# Altium PCB PCB1.PcbDoc
Units mil, origin at the board's own origin, x right, y up, seen from the top; angles counter-clockwise.
Board outline 3045 x 2565 mil, 2 copper layers (Top Layer, Bottom Layer); 21 components, 20 nets, 80 pads, 0 vias.
Unrouted connection lines stored in the file: 2.
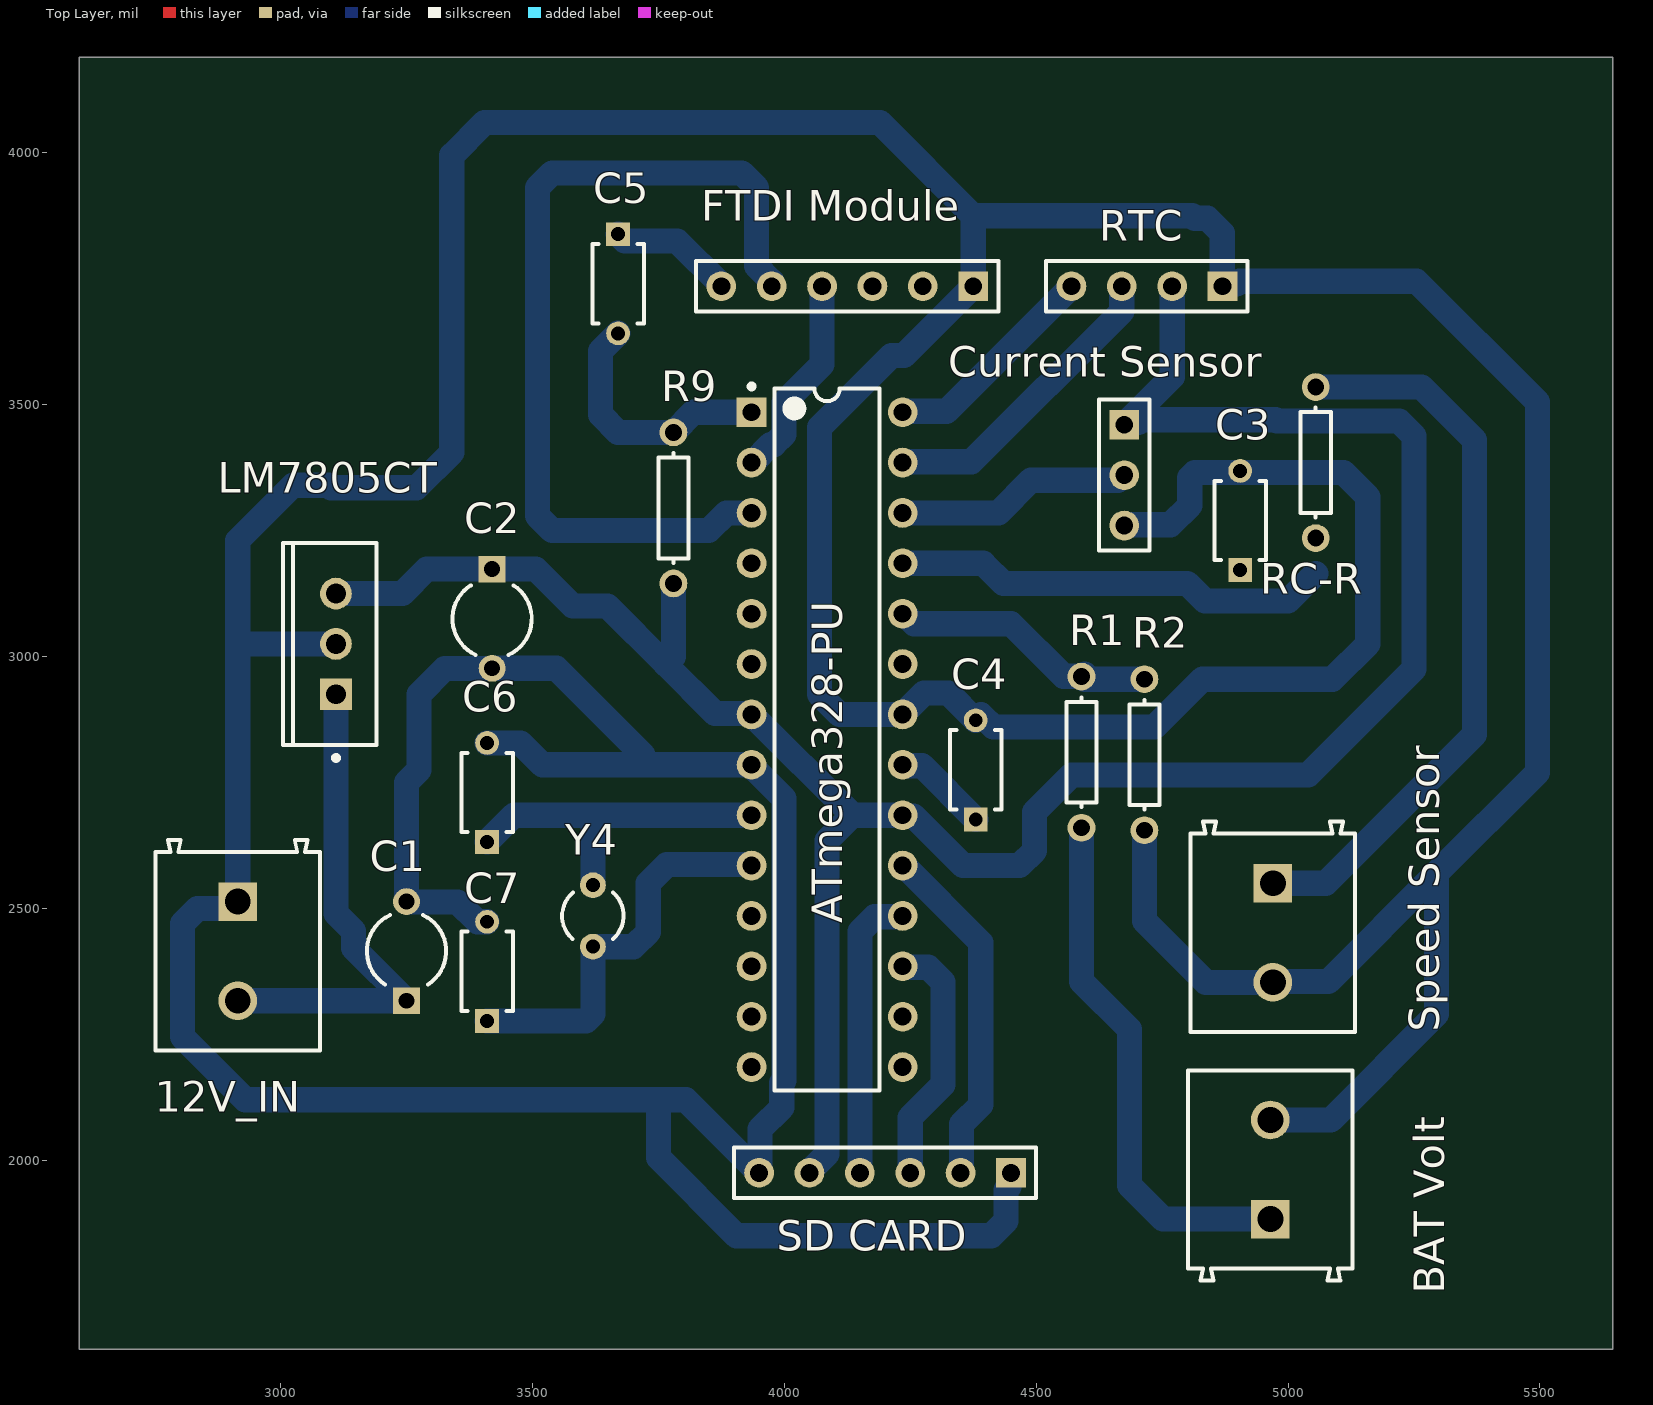
[diagram p0: Top Layer view]
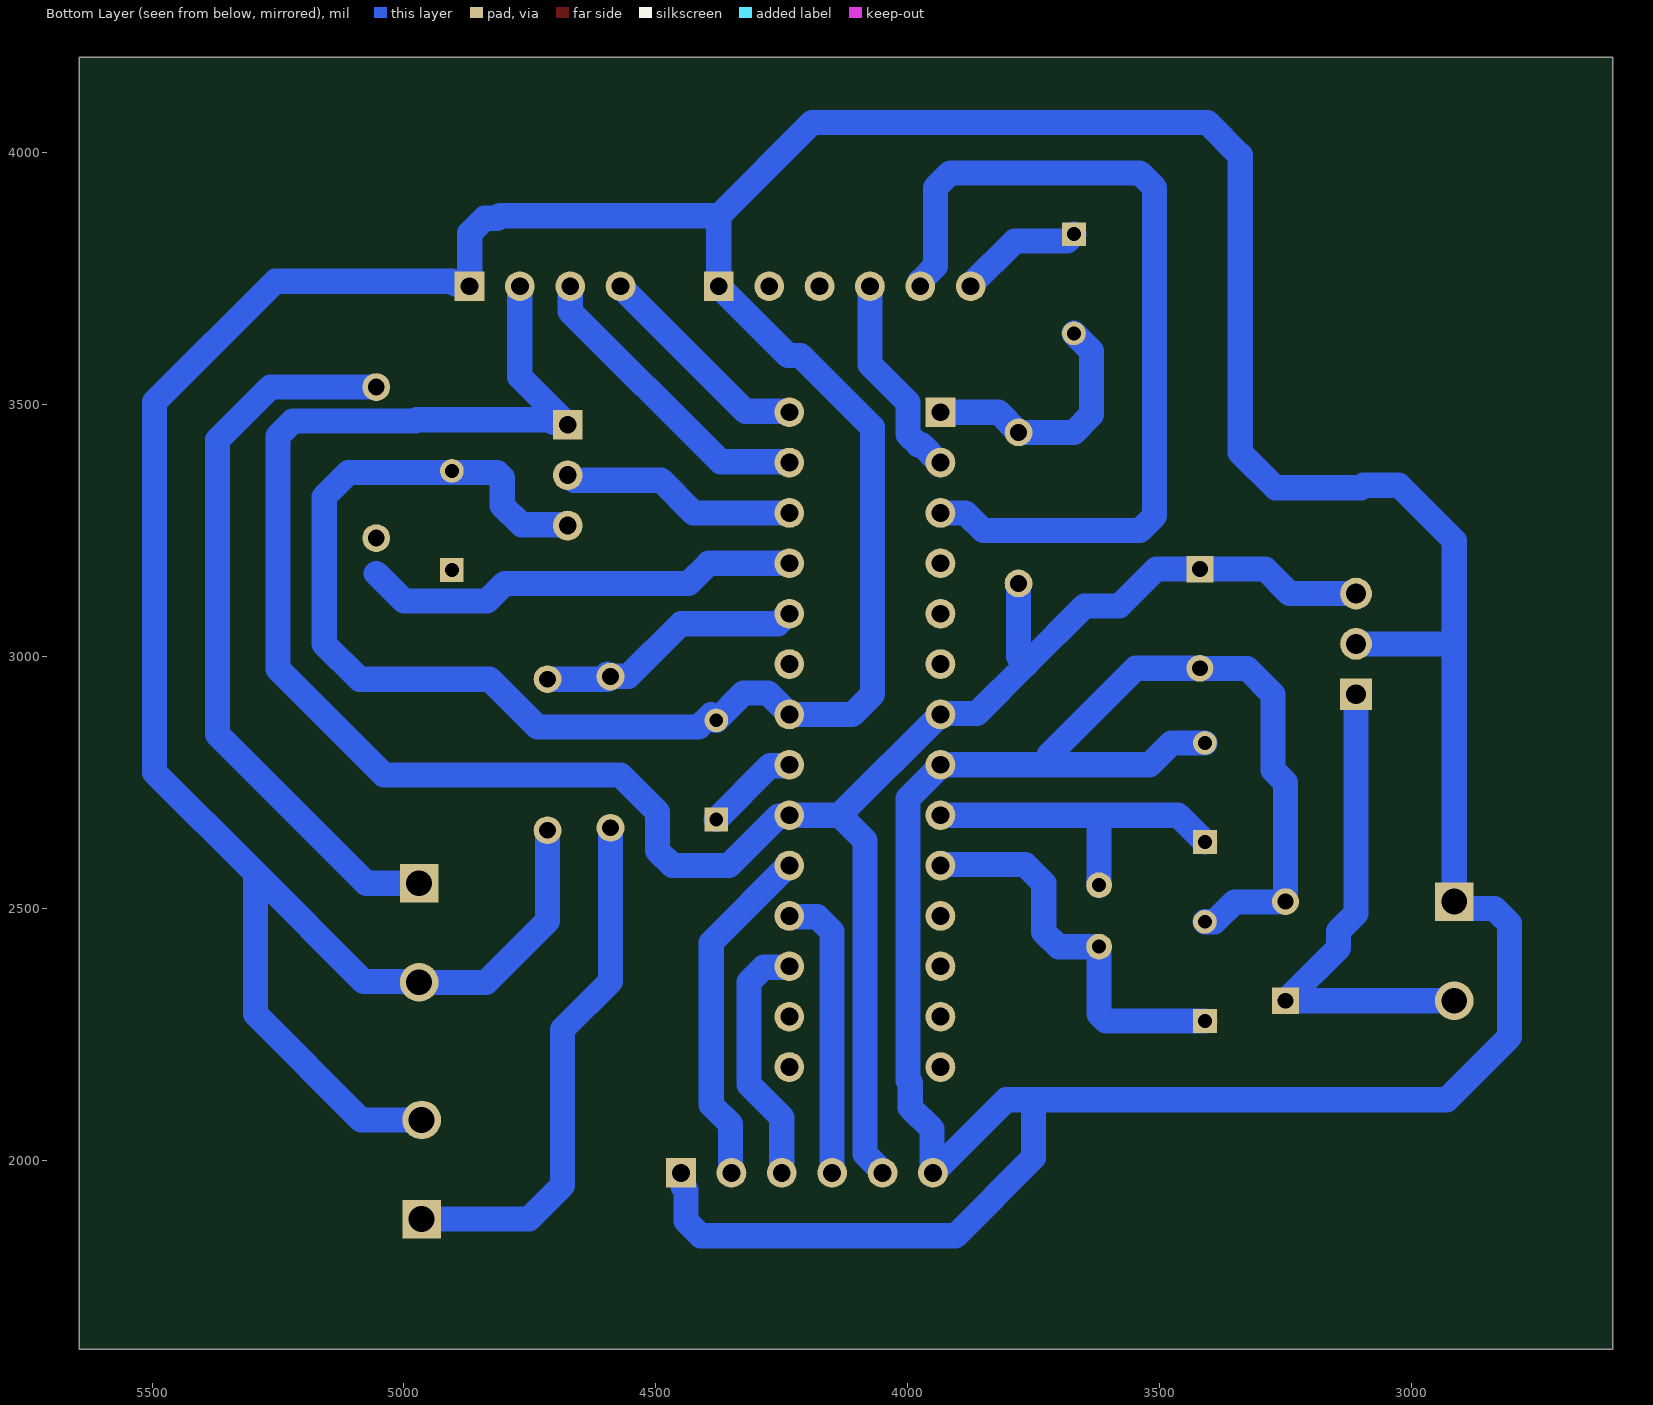
[diagram p1: Bottom Layer view, seen from below]

## Layer stack, top to bottom
Top Solder: solder mask 0.4, Solder Resist, Dk 3.5
Top Layer: signal copper 1.4
Dielectric 1: dielectric 12.6, FR-4, Dk 4.8
Bottom Layer: signal copper 1.4
Bottom Solder: solder mask 0.4, Solder Resist, Dk 3.5

## Board outline
2600,1625 5645,1625 5645,4190 2600,4190

## Design rules (kind name [scope] priority, off if disabled: settings)
Clearance [All] p1: gap=10 ignorepadtopadclearanceinfootprint=FALSE except(0: Arc-Hole Track-Hole SMDPad-Hole THPad-Hole Via-Hole Fill-Hole Poly-Hole Region-Hole Text-Hole)
PolygonConnect [All] p1: connectstyle=Relief reliefconductorwidth=10 reliefentries=4 polygonreliefangle="90 Angle" airgapwidth=10
RoutingVias [All] p1: holewidth=28 width=50 viastyle="Through Hole" minholewidth=28 minwidth=50 maxholewidth=28 maxwidth=50
SolderMaskExpansion [All] p1: expansion=4 istentingtop=FALSE
Width [All] p1: maxlimit=50 minlimit=50 preferedwidth=50 minimp=50.000000 maximp=50.000000 favimp=50.000000
30 further rules are at their usual default settings.

## Components (designator, comment, footprint, x,y, rotation, side; value= is the part's Value field where it differs from the comment)
12V_IN "691213710002" 691213710002 2915,2415 r270 top
ATmega328-PU "ATmega328-PU" 28P3 4085,2835 r0 top
"BAT Volt" "691213710002" 691213710002 4965,1981.58 r90 top
C1 "Cap2" CAPR5-4X5 3250,2415 r90 top value=100uF
C2 "Cap2" CAPR5-4X5 3420,3075 r270 top value=100uF
C3 "100nF" FP-K15H5-MFG 4905,3270 r90 top
C4 "K104K15X7RF53H5" FP-K15H5-MFG 4380,2775 r90 top
C5 "K104K15X7RF53H5" FP-K15H5-MFG 3670,3740 r270 top
C6 "22pF" FP-K15H5-MFG 3410,2730 r90 top
C7 "22pF" FP-K15H5-MFG 3410,2375 r90 top
"Current Sensor" "Current Sensor" HDR1X3 4675,3460 r270 top
"FTDI Module" "FTDI Module" HDR1X6 4375,3735 r180 top
LM7805CT "LM7805CT" FAIR-TO-220-3 3110,3025 r180 top
R1 "Res1" AXIAL-0.3 4590,2810 r90 top value=1K
R2 "Res1" AXIAL-0.3 4715,2805 r270 top value=1K
R9 "Res1" AXIAL-0.3 3780,3295 r90 top value=10K
RC-R "Res1" AXIAL-0.3 5055,3385 r270 top value=1K
RTC "Header 4" HDR1X4 4870,3735 r180 top
"SD CARD" "SD CARD" HDR1X6 4450,1975 r180 top
"Speed Sensor" "Speed Sensor" 691213710002 4970,2451.57 r270 top
Y4 "XTAL" R38 3620,2485 r180 top

## Footprints (in the part's own frame and the unit in brackets; to place one, negate y for a bottom-side part, rotate by r counter-clockwise, add the part's x,y. Pads: shape width x height; smd on the part's side, far side on the other; paste and mask are expansions set on the pad)
28P3 [mm] "28-Pin Plastic Dual In-Line Package (PDIP)"
  rect 1.5x1.5 hole 0.9: 1(-3.81,16.51)
  round 1.5 hole 0.9: 2(-3.81,13.97) 3(-3.81,11.43) 4(-3.81,8.89) 5(-3.81,6.35) 6(-3.81,3.81) 7(-3.81,1.27) 8(-3.81,-1.27) 9(-3.81,-3.81) 10(-3.81,-6.35) 11(-3.81,-8.89) 12(-3.81,-11.43) 13(-3.81,-13.97) 14(-3.81,-16.51) 15(3.81,-16.51) 16(3.81,-13.97) 17(3.81,-11.43) 18(3.81,-8.89) 19(3.81,-6.35) 20(3.81,-3.81) 21(3.81,-1.27) 22(3.81,1.27) 23(3.81,3.81) 24(3.81,6.35) 25(3.81,8.89) 26(3.81,11.43) 27(3.81,13.97) 28(3.81,16.51)
  silkscreen extent -3.93,-17.7 2.65,17.93, body extent -3.6,-17.65 3.6,17.65, height 4.58
691213710002 [mm] "5,00mm - modular - green - Horizontal entry with rising cage clamp -  10,0mm height - 02p"
  rect 1.95x1.95 hole 1.3: 1(-2.5,0)
  round 1.95 hole 1.3: 2(2.5,0)
  silkscreen extent -5.6,-4.15 5,4.15, body extent -5.6,-4.15 5,4.15, height 10.05
AXIAL-0.3 [mm] "Axial Device, Thru-Hole; 2 Leads; 0.3 in Pin Spacing"
  round 1.4 hole 0.85: 1(-3.81,0) 2(3.81,0)
  silkscreen extent -2.77,-0.76 2.77,0.76
CAPR5-4X5 [mm] "Capacitor; 2 Leads"
  rect 1.35x1.35 hole 0.8: 1(-2.5,0)
  round 1.35 hole 0.8: 2(2.5,0)
  silkscreen extent -1.69,-2 1.82,2
FAIR-TO-220-3 [mm] "FM, 3-Leads, Body 10.2x4.7mm, Pitch 2.54mm"
  rect 1.6x1.6 hole 1: 1(0,2.54)
  round 1.6 hole 1: 2(0,0) 3(0,-2.54)
  silkscreen extent -2.04,-5.1 2.66,5.87, body extent -2.04,-5.1 2.66,5.1, height 18.95
FP-K15H5-MFG [mm]
  rect 1.2x1.2 hole 0.7 paste-1000 mask+0: 1(-2.5,0)
  round 1.2 hole 0.7 paste-1000 mask+0: 2(2.5,0)
  silkscreen extent -2,-1.3 2,1.3, body extent -3.2,-1.4 3.2,1.4, height 0.25
HDR1X3 [mm] "Connector; Header; 3 Position"
  rect 1.5x1.5 hole 0.9: 1(0,0)
  round 1.5 hole 0.9: 2(2.54,0) 3(5.08,0)
  silkscreen extent -1.27,-1.27 6.35,1.27
HDR1X4 [mm] "Connector; Header; 4 Position"
  rect 1.5x1.5 hole 0.9: 1(0,0)
  round 1.5 hole 0.9: 2(2.54,0) 3(5.08,0) 4(7.62,0)
  silkscreen extent -1.27,-1.27 8.89,1.27
HDR1X6 [mm] "Connector; Header; 6 Position"
  rect 1.5x1.5 hole 0.9: 1(0,0)
  round 1.5 hole 0.9: 2(2.54,0) 3(5.08,0) 4(7.62,0) 5(10.16,0) 6(12.7,0)
  silkscreen extent -1.27,-1.27 13.97,1.27
R38 [mm] "Crystal, Thru-Hole; 2 Leads; Body 3.1 x 8.2 mm (Dia.xH)"
  round 1.3 hole 0.7: 1(0,1.55) 2(0,-1.55)
  silkscreen extent -1.55,-1.19 1.55,1.17

## Part data
12V_IN "BAT Volt": library part CMP-1502-02526-1, "Serie 213 - 5.00 mm Horizontal Entry Modular with RisingCage Clamp WR-TBL, 2 pin", Manufacturer="Wurth Elektronik", Operating Temperature=-40to105degC, Datasheet URL=http://katalog.we-online.de/em/datasheet/6912137100xx.pdf, Manufacturer URL=http://www.we-online.de, Mounting Technology=THT, Package Reference=691213710002, Packaging=Box, Part Number=691213710002, Pin Number=2, Pitch=5.00mm, Publisher=WurthElektronik
ATmega328-PU: "8-bit AVR Microcontroller, 32KB Flash, 1KB EEPROM, 2KB SRAM, 28-pin PDIP, Industrial Grade (-40°C to 85°C)", ComponentLink1Description="Manufacturer URL", ComponentLink1URL=http://www.atmel.com/, ComponentLink2Description="ATmega48A/48PA/88A/88PA/168A/168PA/328/328P Datasheet", ComponentLink2URL=http://www.atmel.com/dyn/resources/prod_documents/8271.pdf, ComponentLink3Description="ATmega48A/48PA/88A/88PA/168A/168PA/328/328P Summary", ComponentLink3URL=http://www.atmel.com/dyn/resources/prod_documents/8271S.pdf, DatasheetVersion="revD, May-2011", PackageDescription="28-lead (0.300\"/7.62mm Wide) Plastic Dual Inline Package (PDIP)", PackageReference=28P3, PackageVersion="revB, Sep-2001"
C1 C2: "Capacitor", PackageDescription="Capacitor; 2 Leads", PackageReference=CAPR5-4X5, Published=23-Sep-2002, Publisher="Altium Limited"
C3: library part CMP-02417-000048-1, "CAP CER 0.1UF 50V X7R RADIAL", Case/Package=Dipped, Dielectric=X7R, Max Operating Temperature=125°C, Min Operating Temperature=-55°C, Package Quantity=5000, Tolerance=10%, Voltage=50V, Capacitance=100nF, Construction=RADIAL, Depth=2.5mm, Diameter=500um, Height=4mm, Height - Seated (Max)=0.1inch, Lead Diameter=0.5mm, Lead Length=30mm, Lead Pitch=5mm, Lead/Base Style="Formed Leads", Length=4mm, Mount="Through Hole", Packaging=Bulk, Radiation Hardening=No, RoHS Compliant=Yes, Series=K, Termination=Radial, Thickness=2.6mm, Voltage Rating=50V, Voltage Rating (DC)=50V, Weight=0.005644oz, Width=2.5mm
C4 C5 C6 C7: library part CMP-02417-000048-1, "CAP CER 0.1UF 50V X7R RADIAL", Capacitance=100nF, Case/Package=Dipped, Dielectric=X7R, Max Operating Temperature=125°C, Min Operating Temperature=-55°C, Package Quantity=5000, Tolerance=10%, Voltage=50V, Construction=RADIAL, Depth=2.5mm, Diameter=500um, Height=4mm, Height - Seated (Max)=0.1inch, Lead Diameter=0.5mm, Lead Length=30mm, Lead Pitch=5mm, Lead/Base Style="Formed Leads", Length=4mm, Mount="Through Hole", Packaging=Bulk, Radiation Hardening=No, RoHS Compliant=Yes, Series=K, Termination=Radial, Thickness=2.6mm, Voltage Rating=50V, Voltage Rating (DC)=50V, Weight=0.005644oz, Width=2.5mm
"Current Sensor": library part "Header 3", "Header, 3-Pin", LatestRevisionDate=17-Jul-2002, LatestRevisionNote="Re-released for DXP Platform.", Publisher="Altium Limited"
"FTDI Module" "SD CARD": library part "Header 6", "Header, 6-Pin", LatestRevisionDate=17-Jul-2002, LatestRevisionNote="Re-released for DXP Platform.", Publisher="Altium Limited"
LM7805CT: library part CMP-2000-04938-1, "Positive Voltage Regulator, 5 V, 1 A, -40 to 125 degC, 3-Pin TO-220, RoHS, Tube", Manufacturer=FairchildSemiconductor, Maximum Input Voltage=35V, Maximum Output Current=2.2(Typ)A, Maximum Quiescent Current=8mA, Operating Temperature=-40to125degC, Output Voltage=5V, Package=3TO-220AB, Package Description="3-Pin Through Hole Device, Body 10 x 4.5 mm, Pitch 2.54 mm", Package Reference=TO-220, Typical Dropout Voltage @ Current=2@1AV, Accuracy=±4%, Category=LinearRegulator, Datasheet URL=https://datasheet.ciiva.com/26904/lm7805ct-26904988.pdf, Datasheet Version=Aug-12, Line Regulation=100mV, Load Regulation=100mV, Manufacturer URL=https://www.fairchildsemi.com/, Mounting=ThroughHole, Number of Outputs=1, Output Type=Fixed, Package URL=https://www.fairchildsemi.com/package-drawings/TO/TO220B03.pdf, Packaging=Rail/Tube, Polarity=Positive, Rad Hard=No, Type=Linear
R1 R2 R9 RC-R: "Resistor", LatestRevisionDate=17-Jul-2002, LatestRevisionNote="Re-released for DXP Platform.", PackageDescription="Axial Device, Thru-Hole; 2 Leads; 0.3 in Pin Spacing", PackageReference=AXIAL-0.3, Published=8-Jun-2000, Publisher="Altium Limited"
RTC: "Header, 4-Pin", LatestRevisionDate=17-Jul-2002, LatestRevisionNote="Re-released for DXP Platform.", Publisher="Altium Limited"
"Speed Sensor": library part CMP-1502-02526-1, "Serie 213 - 5.00 mm Horizontal Entry Modular with RisingCage Clamp WR-TBL, 2 pin", Manufacturer="Wurth Elektronik", Operating Temperature=-40to105degC, Package Reference=691213710002, Datasheet URL=http://katalog.we-online.de/em/datasheet/6912137100xx.pdf, Manufacturer URL=http://www.we-online.de, Mounting Technology=THT, Packaging=Box, Part Number=691213710002, Pin Number=2, Pitch=5.00mm, Publisher=WurthElektronik
Y4: "Crystal Oscillator", LatestRevisionDate=17-Jul-2002, LatestRevisionNote="Re-released for DXP Platform.", PackageDescription="Crystal, Thru-Hole; 2 Leads; Body 3.1 x 8.2 mm (Dia.xH)", PackageReference=R38, Published=8-Jun-2000, Publisher="Altium Limited"

## Nets (pads, with @x,y where several pads share a name; then routed paths per layer and width w, separated by ;. In a path a pad name is that pad's centre, name@x,y a point inside that pad or via, vN(x,y) a via of type N, cw(c..) or ccw(c..) an arc to the next point about the centre after c; other vN are vias at no path point)
+5: "Current Sensor.1" "SD CARD.5" ATmega328-PU.7 ATmega328-PU.20 C2.1 LM7805CT.3 R9.1 RTC.2 | length 4880.8
  Bottom Layer w50: LM7805CT.3 3241.76,3125 3290.18,3173.43 C2.1 3506.57,3173.43 3580,3100 3649.29,3100 3764.64,2984.64 ; R9.1@3780,3140 3780,3000 3764.64,2984.64 ; 4050,1975 4050,1977.45 4085,2012.45 4085,2635 4135,2685 ; 4675,3460 4691.38,3476.38 4770,3555 RTC.2 ; 4679.53,3464.53 4703.23,3464.53 4708.7,3470 4975,3470 4977.76,3467.24 5220.71,3467.24 5250,3437.95 5250,2975 5040,2765 4570,2765 4496.5,2691.5 4496.5,2614.29 4467.21,2585 4355,2585 4256.73,2683.27 4236.73,2683.27 ATmega328-PU.20 4135,2685 ; 3764.64,2984.64 3862.56,2886.73 3933.27,2886.73 ATmega328-PU.7 4135,2685
BAT_VOLT: ATmega328-PU.24 R1.2 R2.1 | length 533.8
  Bottom Layer w50: ATmega328-PU.24 4237.45,3085 4257.45,3065 4450,3065 4554.02,2960.98 4589.02,2960.98 R1.2 4591.39,2960 R1.2@4596.39,2965 ; R1.2@4596.39,2955 R2.1
Current: "Current Sensor.2" ATmega328-PU.26 | length 471.1
  Bottom Layer w50: ATmega328-PU.26 4425,3285 4490,3350 4662.55,3350 4672.55,3360 4675,3360
GND: 12V_IN.1 "BAT Volt.2" "Current Sensor.3" "FTDI Module.1" "SD CARD.1" "SD CARD.6" "Speed Sensor.2" ATmega328-PU.8 ATmega328-PU.22 C1.2 C2.2 C3.2 C4.2 C6.2 C7.2 LM7805CT.2 R2.2 RTC.1 | length 15422
  Bottom Layer w50: LM7805CT.2 2920,3025 2915,3030 ; C7.2 3390.85,2473.43 3351.46,2512.82 3250.6,2512.82 C1.2 3250,2750 3275,2775 3275,2925 3325.97,2975.97 3419.4,2975.97 C2.2 3547.71,2976.57 3719.64,2804.64 3719.64,2795.36 3730,2785 ; C6.2 3476.57,2828.43 3520,2785 3730,2785 ; ATmega328-PU.8@3930.82,2785 3730,2785 ; ATmega328-PU.8 3935,2782.55 3999.53,2718.02 3999.53,2158.27 3995,2153.74 3995,2105 3951.73,2061.73 3951.73,1976.73 3950,1975 3805,2120 3750,2120 ; C4.2 4325.93,2927.5 4277.5,2927.5 ATmega328-PU.22 4110,2885 4070,2925 4070,3455 4212.74,3597.74 4237.74,3597.74 4375,3735 4375,3875 ; C4.2@4390.79,2884.21 4415,2860 4735,2860 4830,2955 5088.47,2955 5158.47,3025 5158.47,3316.68 5110.15,3365 4905,3365 4815,3365 4805,3355 4805,3300 4766.73,3261.73 4676.73,3261.73 4675,3260 ; 4450,1975 4445.47,1970.47 4445.47,1946.77 4440,1941.3 4440,1879.29 4410.71,1850 3905,1850 3750,2005 3750,2120 ; R2.2 4715,2475 4836.85,2353.15 4970,2353.15 4971.85,2355 5080,2355 5295,2570 ; RTC.1@4869.29,3739.53 4898.23,3739.53 4903.7,3745 5255,3745 5495,3505 5495,2770 5295,2570 ; RTC.1 4869.29,3735.71 4869.29,3840.71 4840,3870 4815,3870 4810,3875 4375,3875 ; 4965,2080 5085,2080 5295,2290 5295,2570 ; 2915,3030 2915,3230 3025,3340 3095,3340 3100,3335 3270,3335 3340,3405 3340,3995 3405,4060 4190,4060 4375,3875 ; 2915,3030 12V_IN.1 2901.61,2500.04 2835.04,2500.04 2805,2470 2805,2245 2930,2120 3750,2120
I2C_SCL: ATmega328-PU.28 RTC.4 | length 438.6
  Bottom Layer w50: ATmega328-PU.28 4236.73,3486.73 4321.73,3486.73 RTC.4
I2C_SDA: ATmega328-PU.27 RTC.3 | length 609.3
  Bottom Layer w50: ATmega328-PU.27 4236.73,3386.73 4371.73,3386.73 4670,3685 RTC.3
MISO(PIN18): "SD CARD.4" ATmega328-PU.18 | length 576.8
  Bottom Layer w50: 4150,1975 4150,2453.98 4179.29,2483.27 4233.27,2483.27 ATmega328-PU.18
MOSI(PIN17): "SD CARD.3" ATmega328-PU.17 | length 501.2
  Bottom Layer w50: ATmega328-PU.17 4236.73,2383.27 4285.71,2383.27 4315,2353.98 4315,2150 4250,2085 4250,1975 4248.27,1976.73
Net12V_IN_2: 12V_IN.2 C1.1 LM7805CT.1 | length 1001.4
  Bottom Layer w50: 12V_IN.2 C1.1 3145,2421.57 3145,2455 3110,2490 LM7805CT.1
NetATmega328-PU_21: ATmega328-PU.21 C4.1 | length 189.9
  Bottom Layer w50: ATmega328-PU.21 4236.73,2783.27 4273.31,2783.27 C4.1
"NetBAT Volt_1": "BAT Volt.1" R1.1 | length 1057
  Bottom Layer w50: R1.1 4590,2355 4685,2260 4685,1950 4751.85,1883.15 4965,1883.15
NetC5_1: "FTDI Module.6" C5.1 | length 249.3
  Bottom Layer w50: C5.1 3683.43,3825 3787.45,3825 3875,3737.45 3875,3735
NetRC-R_1: "Speed Sensor.1" RC-R.1 | length 1465.7
  Bottom Layer w50: 4970,2550 5075,2550 5370,2845 5370,3430 5265,3535 RC-R.1
RST: ATmega328-PU.1 C5.2 R9.2 | length 507.1
  Bottom Layer w50: C5.2 3635,3606.57 3635,3480 3670,3445 R9.2 3820,3485 ATmega328-PU.1
RX(pin2): "FTDI Module.5" ATmega328-PU.3 | length 1770.5
  Bottom Layer w50: ATmega328-PU.3 3885,3285 3850,3250 3539.29,3250 3510,3279.29 3510,3930.71 3539.29,3960 3915.71,3960 3945,3930.71 3945,3775 3975,3745 3975,3735
"SCK(Pin 19)": "SD CARD.2" ATmega328-PU.19 | length 692.2
  Bottom Layer w50: ATmega328-PU.19 4237.45,2585 4390,2432.45 4390,2110 4351.73,2071.73 4351.73,1976.73 4350,1975
Speed-in: ATmega328-PU.25 C3.1 RC-R.2 | length 873.8
  Bottom Layer w50: ATmega328-PU.25 4395,3185 4435,3145 4800,3145 4835,3110 5000,3110 5055,3165
TX(pin3): "FTDI Module.4" ATmega328-PU.2 | length 418.9
  Bottom Layer w50: ATmega328-PU.2@3930.82,3383.27 ATmega328-PU.2@3930.82,3386.73 ; ATmega328-PU.2 3937.45,3385 3972.92,3420.47 3979.03,3420.47 3999.53,3440.97 3999.53,3504.53 4075,3580 4075,3735 4073.27,3733.27
XTAL3: ATmega328-PU.9 C6.1 Y4.2 | length 666.1
  Bottom Layer w50: C6.1 3463.43,2685 3620,2685 ; Y4.2 3620,2685 ; ATmega328-PU.9@3915,2685 3620,2685
XTAL4: ATmega328-PU.10 C7.1 Y4.1 | length 789.8
  Bottom Layer w50: C7.1 3606.57,2276.57 3620,2290 Y4.1 3700.71,2423.98 3730,2453.27 3730,2550.34 3766.73,2587.07 3926.53,2587.07 3926.86,2586.73 3933.27,2586.73 ATmega328-PU.10
pads on no net: "FTDI Module.2" "FTDI Module.3" ATmega328-PU.4 ATmega328-PU.5 ATmega328-PU.6 ATmega328-PU.11 ATmega328-PU.12 ATmega328-PU.13 ATmega328-PU.14 ATmega328-PU.15 ATmega328-PU.16 ATmega328-PU.23